# Altium PCB PCB_V1.0.PcbDoc (part 3 of 3)
Units mil, origin at the board's own origin, x right, y up, seen from the top; angles counter-clockwise.
Board outline 2770.03 x 1450.03 mil, 4 copper layers (Layer 1(SIG), Layer 2(GND), Layer 3(GND), Layer 4(SIG)), stack 61.581 mil thick; 51 components, 42 nets, 232 pads, 371 vias.
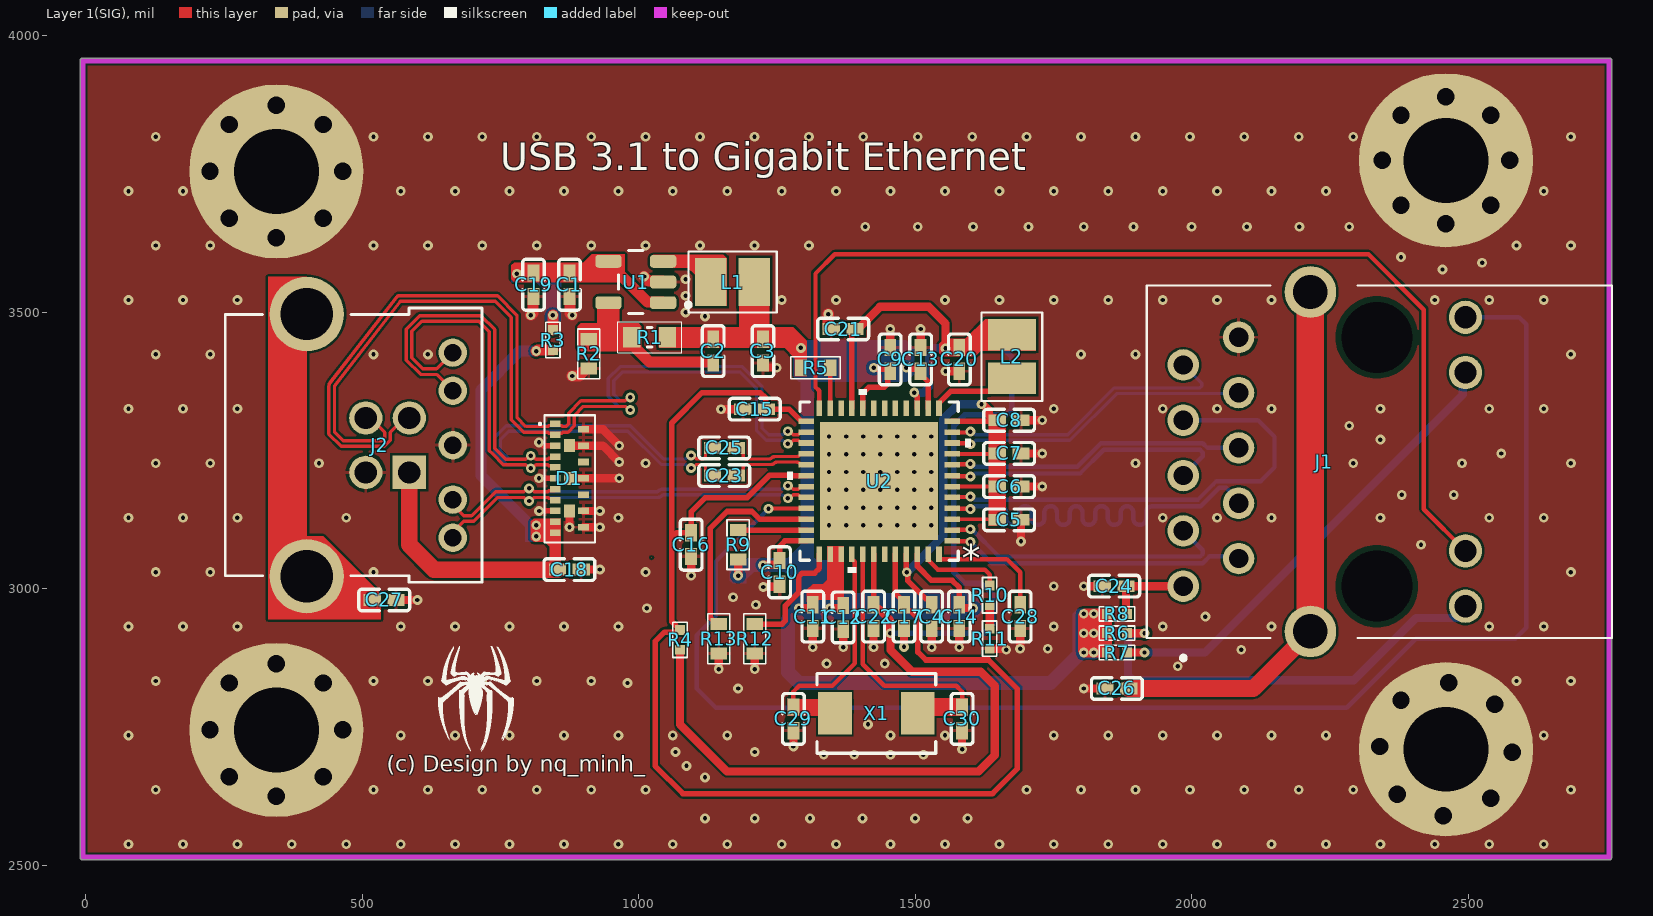
[diagram p0: Layer 1(SIG) view]

## Via types
v1: diameter 17.72, hole 7.87, Layer 1(SIG) to Layer 4(SIG), tented both sides, 371 vias

## Nets (pads, with @x,y where several pads share a name; then routed paths per layer and width w, separated by ;. In a path a pad name is that pad's centre, name@x,y a point inside that pad or via, vN(x,y) a via of type N, cw(c..) or ccw(c..) an arc to the next point about the centre after c; other vN are vias at no path point) (continued)
MDI_TR3_N: (continued)
  Layer 4(SIG) w6: v1(1600,3284.41) 1603.17,3284.41 1608.84,3278.74 1775.89,3278.74 1860.52,3363.37 2014.63,3363.37 2018.14,3366.89 2018.14,3371.86 J1.9
MDI_TR3_P: J1.8 U2.10 | length 557.6
  Layer 1(SIG) w8: U2.10 1567.69,3263.21 1598.48,3263.21 v1(1600,3261.69)
  Layer 4(SIG) w6: v1(1600,3261.69) 1602.33,3261.69 1609.37,3268.74 1780.03,3268.74 1864.66,3353.37 2083.37,3353.37 J1.8
NetC2_1: C2.1 R1.1 R2.2 U1.5 | length 163.5
  Layer 1(SIG) w20: R1.1@985,3440 990,3440 1020,3410 1134.37,3410 1135,3409.37 C2.1
NetC24_1: C24.1 J1.1 R8.1 | length 154.2
  Layer 1(SIG) w15: R8.1 1881.46,2956.54 C24.1 J1.1
NetC28_1: C28.1 U2.48 | length 223.6
  Layer 1(SIG) w8: U2.48 1543.27,3055.01 1544.27,3054.01 1665.99,3054.01 1690,3030 C28.1
NetC29_2: C29.2 U2.40 X1.1 | length 359.6
  Layer 1(SIG) w8: C29.2 1280,2814.37 1290.63,2825 1350.5,2825 1390.79,2865.29 1390.79,3049 1385.79,3054 U2.40
NetC30_2: C30.2 U2.41 X1.2 | length 427.1
  Layer 1(SIG) w8: U2.41 1405.47,2863.9 1444.37,2825 1574.37,2825 1585,2814.37 C30.2
NetJ1_11: J1.11 R6.1 | length 809.2
  Layer 1(SIG) w15: R6.1 v1(1915,2920)
  Layer 4(SIG) w15: v1(1915,2920) 1914.48,2919.48 1893.79,2919.48 1885,2910.69 1885,2843.79 1893.79,2835 2293.52,2835 2406.01,2947.48 2486.28,2947.48 2495.07,2956.27 J1.11
NetJ1_13: J1.13 R7.1 | length 842.4
  Layer 1(SIG) w15: R7.1 v1(1915,2885)
  Layer 4(SIG) w15: v1(1915,2885) 2023.94,2885 2490.49,3351.55 2490.49,3386.48 J1.13
NetL1_1: L1.1 U1.3
NetL2_1: L2.1 U2.13 | length 159.2
  Layer 1(SIG) w10: U2.13 1543.27,3336 1564.35,3357.09 1636.69,3357.09 1660.24,3380.63 L2.1
NetR5_1: R5.1 U2.23 | length 73
  Layer 1(SIG) w8: U2.23 1346.46,3327.04 R5.1 R5.1
NetR9_1: R9.1 U2.35 | length 123
  Layer 1(SIG) w10: R9.1 1293.92,3106.5 1294,3106.42 U2.35
NetR10_1: R10.1 R11.2 | length 42.5
  Layer 1(SIG) w15: R11.2 R10.1
NetR10_2: R10.2 U2.47 | length 152.4
  Layer 1(SIG) w8: U2.47 1524.58,3062 1524.58,3051.37 1540.95,3035 1626,3035 1635,3026 R10.2
NetR12_1: R12.1 U2.37 | length 216.9
  Layer 1(SIG) w10: R12.1 1259.49,2936.5 1265.63,2942.64 1265.63,2969.62 1290,2993.99 1290,3022.64 1295.86,3028.5 1318.22,3028.5 1326.73,3037.01 U2.37
NetR13_1: R13.1 U2.34 | length 373.2
  Layer 1(SIG) w10: R13.1 1141,2936.5 1130,2947.5 1130,3110 1160,3140 1205,3140 1218.9,3126.1 U2.34
USB_D_N: D1.1 J2.2 U2.27 | length 1659.4
  Layer 1(SIG) w6: J2.2 577.38,3309.21 551.06,3282.9 551.06,3268.92 540.07,3257.93 462.07,3257.93 440,3280 440,3366.72 cw(c450,3366.72) 441.54,3372.05 cw(c450,3366.72) 442.1,3372.85 561.25,3526.14 cw(c569.14,3520) 562.06,3527.06 562.8,3527.8 563.54,3528.54 cw(c567.07,3525) 563.94,3528.9 ccw(c560.18,3533.57) 564.98,3529.98 745,3530 780,3495 780,3310 796.42,3293.58 835.78,3293.58 837.71,3295.52 846.5,3295.52 D1.1 852.31,3295.52 861.11,3295.52 863.04,3293.58 868.25,3293.58 873.52,3298.85 873.52,3317.66 895.86,3340 975.47,3340 981.83,3346.36 v1(985,3346.36) ; v1(1270,3262.38) 1273.01,3262.38 1279.37,3268.74 1289.16,3268.74 1294,3263.9 U2.27
  Layer 4(SIG) w6: v1(985,3346.36) 981.99,3346.36 975.63,3340 967.14,3340 955,3352.14 955,3376.49 970.72,3392.21 1183.65,3392.21 1213.14,3362.72 1213.14,3286.86 1219,3281 1225.4,3274.6 1231.26,3268.74 1260.63,3268.74 1266.99,3262.38 v1(1270,3262.38)
USB_D_P: D1.2 J2.3 U2.26 | length 1649.1
  Layer 1(SIG) w6: J2.3 514.75,3309.21 541.06,3282.9 541.06,3273.06 535.93,3267.93 466.21,3267.93 450,3284.14 450,3366.72 569.13,3519.99 740.86,3520 770,3490.86 770,3305.86 777.93,3297.93 792.28,3283.58 835.78,3283.58 837.71,3281.65 846.5,3281.65 D1.2 852.31,3281.65 861.11,3281.65 863.04,3283.58 872.39,3283.58 883.52,3294.71 883.52,3313.52 900,3330 975.63,3330 981.99,3323.64 v1(985,3323.64) v1@985,3329.5 ; v1(1270,3285.1) 1273.01,3285.1 1279.37,3278.74 1289.16,3278.74 1294,3283.58 U2.26
  Layer 4(SIG) w6: v1(985,3323.64) 981.99,3323.64 975.63,3330 963,3330 945,3348 945,3380.63 966.58,3402.21 1187.79,3402.21 1223.14,3366.86 1223.14,3291 1235.4,3278.74 1260.63,3278.74 1266.99,3285.1 v1(1270,3285.1)
USB_RX_N: D1.7 J2.8 U2.31 | length 738.9
  Layer 1(SIG) w6: J2.8 664.17,3151.79 683.84,3132.13 697.98,3132.13 741.33,3175.47 792.61,3175.47 798.97,3181.83 v1(801.99,3181.83) 805,3181.83 811.36,3175.47 835.78,3175.47 837.71,3177.41 846.5,3177.41 D1.7 ; v1(1270,3186.67) 1273.01,3186.67 1279.37,3180.31 1289.16,3180.31 1294,3185.16 U2.31
  Layer 4(SIG) w6: v1(801.99,3181.83) cw(c801.99,3174.55) 807.13,3179.7 ccw(c817.34,3189.9) 817.34,3175.47 1031.01,3175.47 ccw(c1031.01,3183.74) 1036.85,3177.89 cw(c1042.7,3172.05) 1042.7,3180.32 1256.13,3180.31 ccw(c1256.13,3191.17) 1263.81,3183.49 1264.85,3184.54 cw(c1270,3179.39) v1(1270,3186.67)
USB_RX_P: D1.8 J2.9 U2.32 | length 738.9
  Layer 1(SIG) w6: J2.9 664.17,3102.46 683.84,3122.13 702.13,3122.13 745.47,3165.47 792.61,3165.47 798.97,3159.11 v1(801.99,3159.11) 805,3159.11 811.36,3165.47 835.78,3165.47 837.71,3163.54 846.5,3163.54 D1.8 ; v1(1270,3163.96) 1273.01,3163.96 1279.37,3170.31 1289.16,3170.31 1294,3165.47 U2.32
  Layer 4(SIG) w6: v1(801.99,3159.11) ccw(c801.99,3166.39) 807.13,3161.25 cw(c817.34,3151.04) 817.34,3165.47 1035.15,3165.47 ccw(c1035.15,3173.74) 1040.99,3167.89 cw(c1046.84,3162.05) 1046.84,3170.32 1256.13,3170.31 cw(c1256.13,3159.46) 1263.81,3167.14 1264.85,3166.09 ccw(c1270,3171.24) v1(1270,3163.96)
USB_TX_N: C25.1 D1.5 J2.5 | length 1204.7
  Layer 1(SIG) w6: J2.5 634.72,3397.87 610,3397.87 590,3417.87 590,3465.86 608.28,3484.14 710.86,3484.14 730,3465 730,3250 735.86,3244.14 755.47,3224.53 795.63,3224.53 801.99,3218.17 v1(805,3218.17) 808.01,3218.17 814.37,3224.53 825.69,3224.53 835.78,3224.53 837.71,3222.59 846.5,3222.59 D1.5 D1.5@845.47,3219.69 ; v1(1095,3241.36) 1098.01,3241.36 1104.37,3235 1117.47,3235 1120.99,3238.51 1120.99,3247.37 1128.62,3255 C25.1
  Layer 4(SIG) w6: v1(805,3218.17) 801.99,3218.17 795.63,3224.53 761.59,3224.53 740,3246.12 740,3274.14 760.86,3295 985,3295 1045,3235 1085.63,3235 1091.99,3241.36 v1(1095,3241.36)
USB_TX_P: C23.1 D1.4 J2.6 | length 1198.4
  Layer 1(SIG) w6: J2.6 634.72,3387.87 605.86,3387.87 580,3413.73 580,3470 604.14,3494.14 715,3494.14 740,3469.14 740,3254.14 759.61,3234.53 795.63,3234.53 v1@801.99,3240.89 ; v1(805,3240.89) 808.01,3240.89 814.37,3234.53 829.84,3234.53 835.78,3234.53 837.71,3236.46 846.5,3236.46 D1.4 ; v1(1095,3218.64) 1098.01,3218.64 1104.37,3225 1117.47,3225 1120.99,3221.49 1120.99,3212.63 1128.62,3205 C23.1
  Layer 4(SIG) w6: v1@804.5,3240.39 v1(805,3240.89) 801.99,3240.89 795.63,3234.53 765.73,3234.53 750,3250.26 750,3270 765,3285 980.86,3285 1040.86,3225 1085.63,3225 1091.99,3218.64 v1(1095,3218.64)
USB_TXC_N: C23.2 U2.29 | length 141
  Layer 1(SIG) w6: C23.2 ccw(c1176.46,3216.89) C23.2@1184.85,3208.47 ; C23.2@1184.86,3208.48 1185.88,3209.5 ccw(c1178.32,3217.06) 1189.01,3217.06 1189.01,3219 cw(c1195.01,3219) 1190.77,3223.24 cw(c1195.01,3219) 1195.01,3225 1239.87,3225 ccw(c1239.87,3232.46) 1245.15,3227.19 cw(c1250.42,3221.91) 1250.42,3229.37 1285.73,3229.37 cw(c1285.73,3221.1) 1291.58,3226.95 ccw(c1297.42,3232.79) 1297.42,3224.53 U2.29
USB_TXC_P: C25.2 U2.28 | length 141
  Layer 1(SIG) w6: C25.2 cw(c1176.46,3243.11) C25.2@1184.85,3251.53 ; C25.2@1184.86,3251.52 1185.88,3250.5 cw(c1178.32,3242.94) 1189.01,3242.94 1189.01,3241 ccw(c1195.01,3241) 1190.77,3236.76 ccw(c1195.01,3241) 1195.01,3235 1235.73,3235 ccw(c1235.73,3242.46) 1241.01,3237.19 cw(c1246.28,3231.91) 1246.28,3239.37 1285.73,3239.37 ccw(c1285.73,3247.64) 1291.58,3241.79 cw(c1297.42,3235.95) 1297.42,3244.21 U2.28
pads on no net: D1.14 D1.16 J1.MH3 J1.MH4 U2.16 U2.17 U2.18 U2.19 U2.22 U2.43

## Polygon pours and split planes (outlines as drawn)
GND on Layer 4(SIG) "GND_L04_P001" (solid, remove dead copper, pour order 1): -4.04,3947.8 2755.96,3947.8 2755.96,2507.8 -4.04,2507.8
GND on Layer 1(SIG) "GND_L01_P000" (solid, remove dead copper, pour order 0): -5,3955 2755,3955 2755,2515 -5,2515
GND on Layer 3(GND) (split plane): 2759.25,3957.84 2759.35,3957.61 2759.08,3958.02
GND on Layer 3(GND) (split plane): 2757.84,3959.25 2758.02,3959.08 2757.61,3959.35
GND on Layer 3(GND) (split plane): 2760.01,3956 2760.01,3955.75 2759.92,3956.23
GND on Layer 3(GND) (split plane): -6.23,3959.92 -6,3960.02 -5.75,3960.02
GND on Layer 3(GND) (split plane): 2756.23,3959.92 2755.75,3960.02 2756,3960.02
GND on Layer 3(GND) (split plane): 2760.01,2514 2759.92,2513.77 2760.01,2514.25
GND on Layer 3(GND) (split plane): 2759.25,2512.16 2759.08,2511.98 2759.35,2512.39
GND on Layer 3(GND) (split plane): 2757.84,2510.75 2757.61,2510.65 2758.02,2510.92
GND on Layer 3(GND) (split plane): 2756,2509.99 2755.75,2509.99 2756.23,2510.08
GND on Layer 3(GND) (split plane): -8.02,3959.08 -7.84,3959.25 -7.61,3959.35
GND on Layer 3(GND) (split plane): -9.35,3957.61 -9.25,3957.84 -9.08,3958.02
GND on Layer 3(GND) (split plane): -10.01,3955.75 -10.01,3956 -9.92,3956.23
GND on Layer 3(GND) (split plane): -9.92,2513.77 -10.01,2514 -10.01,2514.25
GND on Layer 3(GND) (split plane): 2755,3959.96 2756.9,3959.58 2758.51,3958.51 2759.58,3956.9 2759.96,3955 2759.96,2515 2759.58,2513.1 2758.51,2511.49 2756.9,2510.42 2755,2510.04 -5,2510.04 -6.9,2510.42 -8.51,2511.49 -9.58,2513.1 -9.96,2515 -9.96,3955 -9.58,3956.9 -8.51,3958.51 -6.9,3959.58 -5,3959.96 2755,3959.96
GND on Layer 3(GND) (split plane): -5.75,2509.99 -6,2509.99 -6.23,2510.08
GND on Layer 3(GND) (split plane): -9.08,2511.98 -9.25,2512.16 -9.35,2512.39
GND on Layer 3(GND) (split plane): -7.61,2510.65 -7.84,2510.75 -8.02,2510.92
GND on Layer 2(GND) (split plane): 2759.25,3957.84 2759.35,3957.61 2759.08,3958.02
GND on Layer 2(GND) (split plane): 2757.84,3959.25 2758.02,3959.08 2757.61,3959.35
GND on Layer 2(GND) (split plane): 2760.01,3956 2760.01,3955.75 2759.92,3956.23
GND on Layer 2(GND) (split plane): -6.23,3959.92 -6,3960.02 -5.75,3960.02
GND on Layer 2(GND) (split plane): 2756.23,3959.92 2755.75,3960.02 2756,3960.02
GND on Layer 2(GND) (split plane): 2760.01,2514 2759.92,2513.77 2760.01,2514.25
GND on Layer 2(GND) (split plane): 2759.25,2512.16 2759.08,2511.98 2759.35,2512.39
GND on Layer 2(GND) (split plane): 2757.84,2510.75 2757.61,2510.65 2758.02,2510.92
GND on Layer 2(GND) (split plane): 2756,2509.99 2755.75,2509.99 2756.23,2510.08
GND on Layer 2(GND) (split plane): -8.02,3959.08 -7.84,3959.25 -7.61,3959.35
GND on Layer 2(GND) (split plane): -9.35,3957.61 -9.25,3957.84 -9.08,3958.02
GND on Layer 2(GND) (split plane): -10.01,3955.75 -10.01,3956 -9.92,3956.23
GND on Layer 2(GND) (split plane): -9.92,2513.77 -10.01,2514 -10.01,2514.25
GND on Layer 2(GND) (split plane): 2755,3959.96 2756.9,3959.58 2758.51,3958.51 2759.58,3956.9 2759.96,3955 2759.96,2515 2759.58,2513.1 2758.51,2511.49 2756.9,2510.42 2755,2510.04 -5,2510.04 -6.9,2510.42 -8.51,2511.49 -9.58,2513.1 -9.96,2515 -9.96,3955 -9.58,3956.9 -8.51,3958.51 -6.9,3959.58 -5,3959.96 2755,3959.96
GND on Layer 2(GND) (split plane): -5.75,2509.99 -6,2509.99 -6.23,2510.08
GND on Layer 2(GND) (split plane): -9.08,2511.98 -9.25,2512.16 -9.35,2512.39
GND on Layer 2(GND) (split plane): -7.61,2510.65 -7.84,2510.75 -8.02,2510.92

## Keep-outs
Keep-Out Layer:
  lines w10: -5,2515 -5,3955 2755,3955 2755,2515 -5,2515

## Other copper
Layer 1(SIG):
  region net +3V3: 1856,2964 1805,2964 1795,2954 1795,2886 1805,2876 1856,2876
  region net NetC30_2: 1595.63,2802.01 1505,2802.01 1505,2770.91 1595.63,2770.91
  region net NetC29_2: 1269.37,2802.01 1270.77,2800.62 1385.5,2800.62 1385.5,2775 1381.41,2770.91 1269.37,2770.91
  region net +1V2: 1718.31,3487.91 1626.53,3487.91 1590.63,3452.01 1552.01,3452.01 1543.27,3443.27 1543.27,3425.91 1548.27,3420.91 1608.84,3420.91 1618.76,3430.83 1718.31,3430.83
  region net +2V5: 1632.99,3315.63 1664.09,3315.63 1664.09,3114.37 1632.99,3114.37
  region net +VBUS: 859.25,3127.17 859.25,3060.07 855.26,3060.07 830.32,3085 810,3085 805,3090 805,3122.14 810,3127.14
  region net +3V3: 1304.37,2976.38 1304.37,2998.21 1315,3008.54 1347.16,3008.54 1341.42,3002.8 1315,2976.38
  region net +3V3: 1305,2980 1364.45,2980 1370,2980 1371.1,3077 1341.42,3077 1341.42,3065 1341.42,3016.42
  region net +3V3: 1235.63,3473.31 1280,3473.31 1304.5,3448.81 1304.5,3385 1282.75,3385 1282.5,3385.25 1282.5,3417.5 1264.09,3435.91 1235.63,3435.91
  region net NetC2_1: 1000,3480 1005,3475 1005,3435 1000,3430 895,3430 890,3435 890,3475 895,3480
  region net NetC2_1: 965,3525 965,3440 925,3440 925,3525
  region net +3V3: 1235.63,3473.31 1036.73,3473.31 1036.73,3436.69 1037.52,3435.91 1235.63,3435.91
  region net NetL1_1: 1026.4,3604.02 1153.46,3604.02 1159.17,3598.31 1159.17,3511.69 1102.09,3511.69 1102.09,3567.91 1089.21,3580.79 1026.4,3580.79
  region net +VBUSF: 770,3560 775,3555 975,3555 975,3605 915,3605 900,3590 775,3590 770,3585
  region net GND_U: 330,3085 330,3564.49 400,3564.49 400,3060.29
  region net GND_U: 534.09,2990.91 534.09,2945 330,2945 330,3095 430,3095
  region net +VBUS: 839.57,3127.14 859.25,3127.17 859.25,3095.76 859.25,3024.37 839.57,3024.37
  region net +1V2A: 1074.81,2929.62 1075.04,2929.62 1075.04,2929.4 1074.81,2929.4
  region: 1023.44,3056.9 1023.77,3056.9 1023.77,3056.57 1023.44,3056.57
Layer 4(SIG):
  region net +3V3: 1856,2964 1794,2964 1785,2955 1785,2885 1794,2876 1856,2876
  region net +3V3: 1295,3090 1295,3082.1 1267.9,3055 1177.01,3055 1165,3042.99 1165,3015 1170,3010 1195,3010 1195,3017.1 1212.1,3034.2 1305,3034.2
  region net +3V3: 1280,3440 1290,3450 1483.65,3450 1498.65,3435 1498.65,3388.65 1485,3375 1290,3375 1280,3385
  region net +3V3: 1620,2985 1612.5,2992.5 1275,2992.5 1275,2950 1280,2945 1610,2945 1620,2955
  region net +3V3: 1225,3034.2 1225,3051.77 1348.23,3051.77 1360,3040 1360,2960 1355,2955 1285,2955 1275,2965 1275,3020 1260.8,3034.2
  region net +VBUSF: 830,3485 830,3540 815,3555 770,3555 770,3580 835,3580 860,3555 860,3485
  region net +VBUS: 795.05,3085 830,3085 830,3125 795.05,3124.95

## Silkscreen, mask and mechanical layers (free items; w line width, h text height)
Top Overlay:
  drawing of 2 lines, arcs and shapes, not listed
  text "USB 3.1 to Gigabit Ethernet" at 750,3756.66 h50
  text "(c) Design by nq_minh_" at 545,2659.42 h50
Top Solder:
  lines w10: 286.34,3608.03 233.64,3555.33 233.64,3513.64 230,3510 -5,3510 -5,3955 485,3955 423.08,3893.08 420.72,3893.08

## Text inside footprints (layer, text, board x,y; h text height)
U2: Top Overlay "*" at 1618.5,3101.89 h50 r180